# Altium PCB PlacaE3.PcbDoc
Units mm, origin at the board's own origin, x right, y up, seen from the top; angles counter-clockwise.
Board outline 100 x 100 mm, 2 copper layers (Top Layer, Bottom Layer); 90 components, 100 nets, 323 pads, 46 vias.
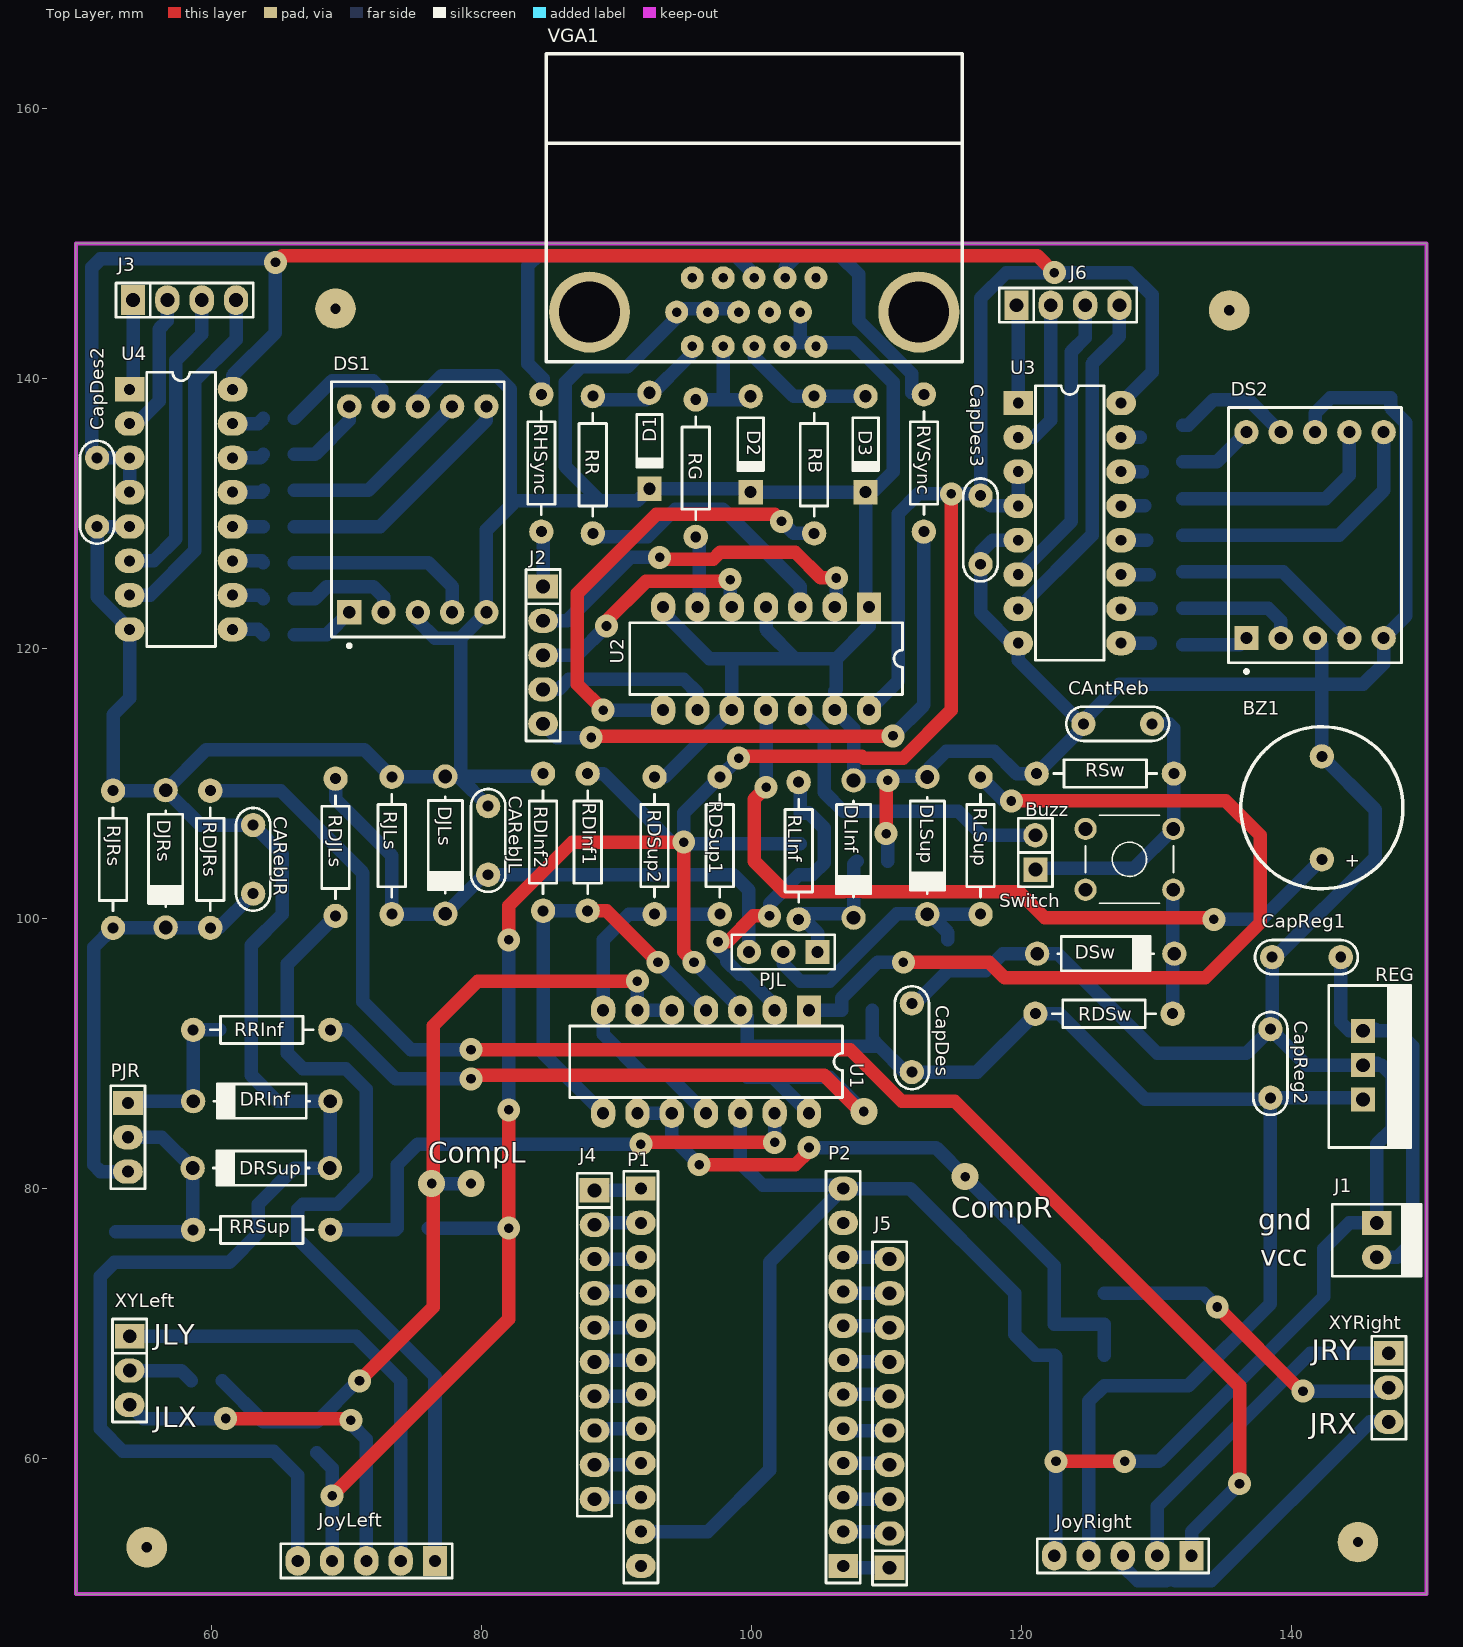
[diagram p0: Top Layer view]
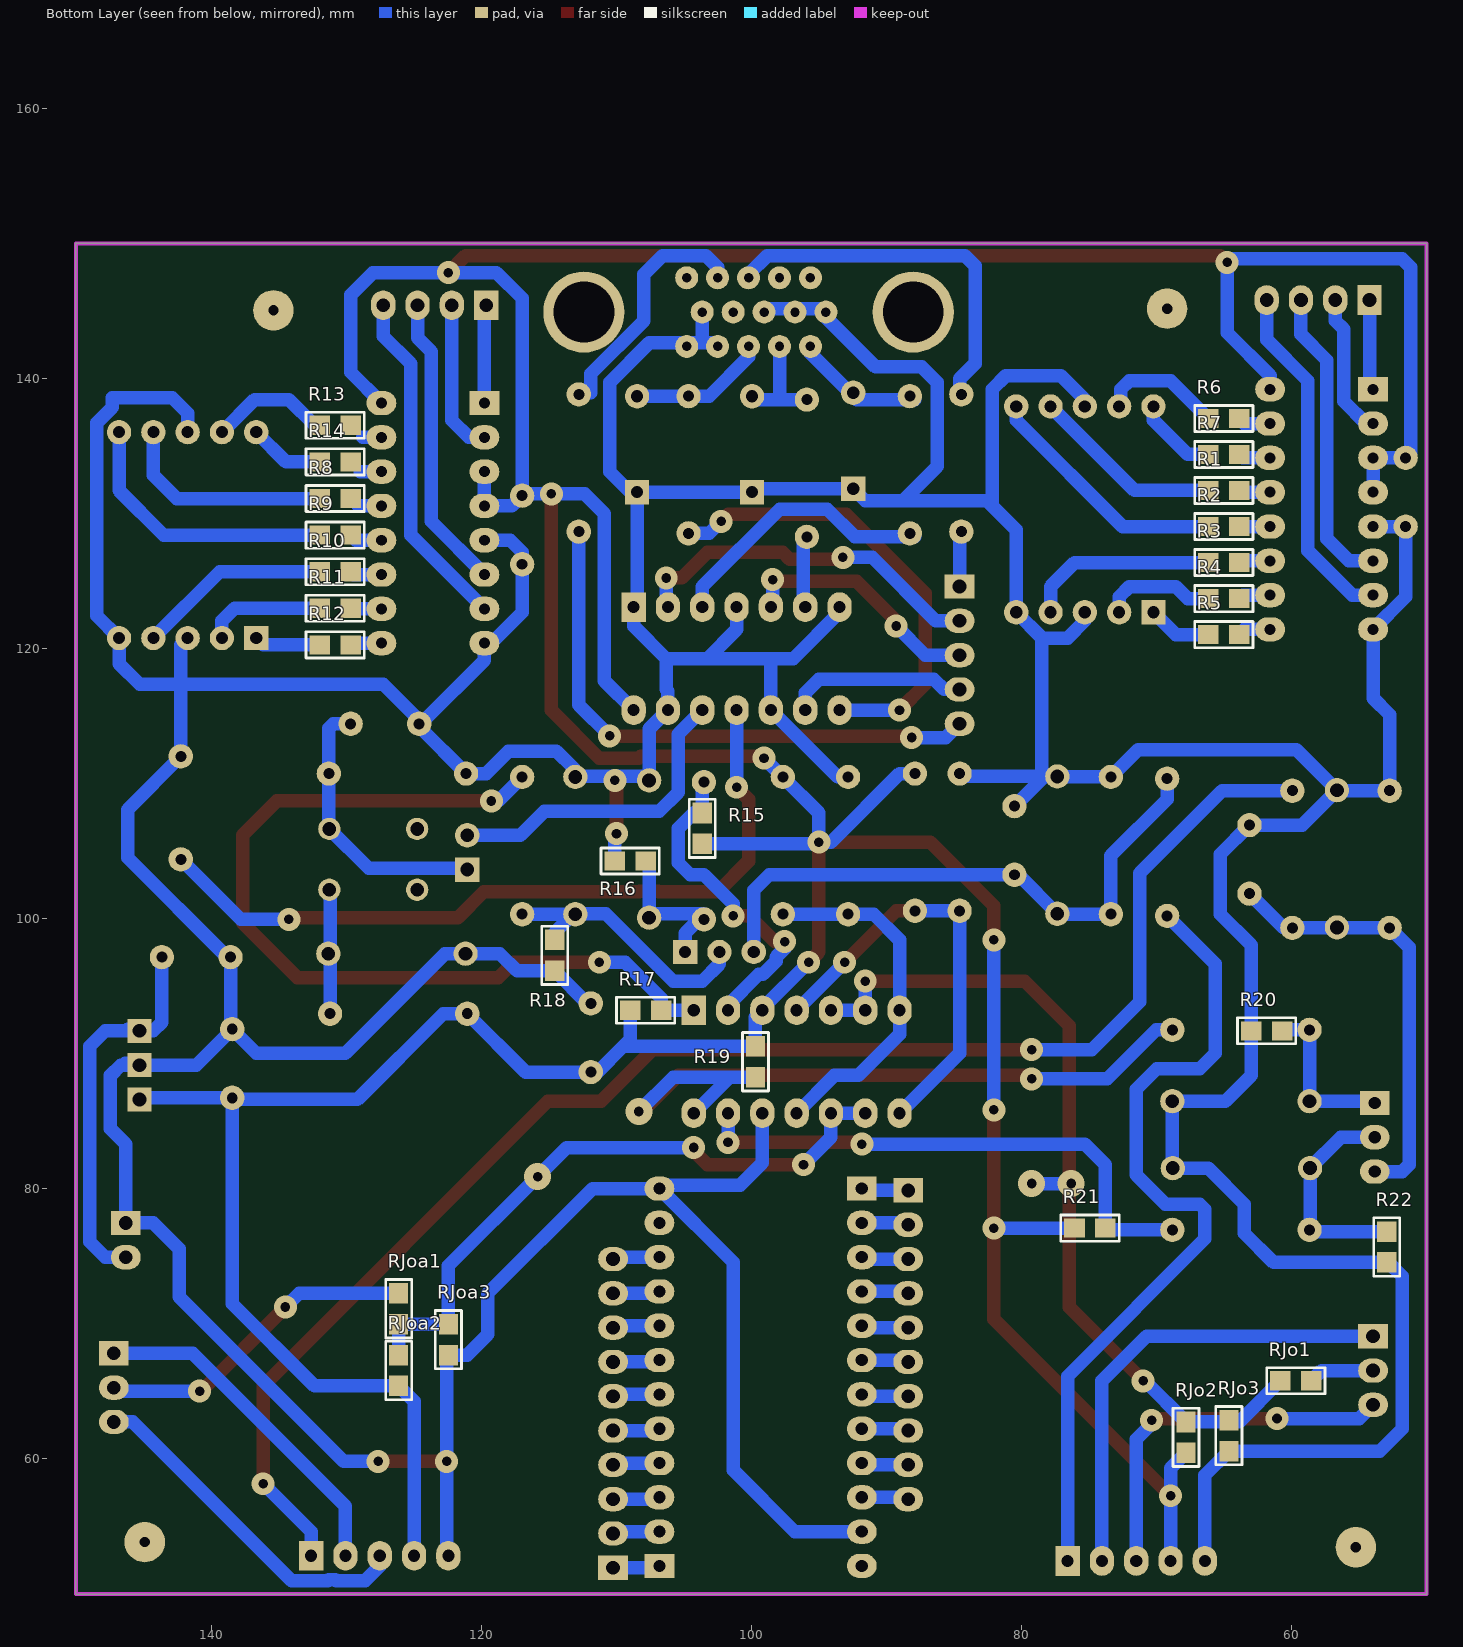
[diagram p1: Bottom Layer view, seen from below]

## Layer stack, top to bottom
Top Solder: solder mask 0.0102, Solder Resist, Dk 3.5
Top Layer: signal copper 0.0356
Dielectric1: dielectric 0.32, FR-4, Dk 4.8
Bottom Layer: signal copper 0.0356
Bottom Solder: solder mask 0.0102, Solder Resist, Dk 3.5

## Board outline
50,50 150,50 150,150 50,150

## Design rules (kind name [scope] priority, off if disabled: settings)
Clearance [All] p1: gap=0.254 ignorepadtopadclearanceinfootprint=FALSE except(0: Arc-Hole Track-Hole SMDPad-Hole THPad-Hole Via-Hole Fill-Hole Poly-Hole Region-Hole Text-Hole)
PolygonConnect [All] p1: connectstyle=Relief reliefconductorwidth=0.254 reliefentries=4 polygonreliefangle="90 Angle" airgapwidth=0.254
RoutingVias [All] p1: holewidth=0.711 width=1.27 viastyle="Through Hole" minholewidth=0.711 minwidth=1.27 maxholewidth=0.711 maxwidth=1.27
SolderMaskExpansion [All] p1: expansion=0.102
Width [All] p1: maxlimit=2 minlimit=0.5 preferedwidth=1
30 further rules are at their usual default settings.

## Components (designator, comment, footprint, x,y, rotation, side; value= is the part's Value field where it differs from the comment)
Buzz "CON2" SIP2 121.031,104.902 r90 top (schematic designator GPIO)
BZ1 "BUZZER" "BUZZER 12MM" 142.24,108.204 r90 top
CAntReb "CAP" CAP200 127.127,114.427 r180 top
CapDes "CAP" CAP200 111.887,91.186 r90 top
CapDes2 "CAP" CAP200 51.562,131.572 r270 top
CapDes3 "CAP" CAP200 116.967,128.778 r270 top
CapReg1 "CAP" CAP200 141.097,97.155 r180 top
CapReg2 "CAP" CAP200 138.43,89.281 r90 top
CARebJL "CAP" CAP200 80.518,105.791 r90 top
CARebJR "CAP" CAP200 63.119,104.394 r90 top
D1 "Diode 1N4148" DO-35 92.456,135.382 r270 top
D2 "Diode 1N4148" DO-35 99.949,135.128 r270 top
D3 "Diode 1N4148" DO-35 108.458,135.128 r270 top
DJLs "DIODO" DO41 77.343,105.447 r270 top
DJRs "DIODO" DO41 56.642,104.431 r270 top
DLInf "DIODO" DO41 107.569,105.156 r270 top
DLSup "DIODO" DO41 113.03,105.41 r270 top
DRInf "DIODO" DO41 63.754,86.487 r180 top
DRSup "DIODO" DO41 63.717,81.534 r180 top
DS1 "Dpy Blue-CC" H 75.311,130.302 r0 top
DS2 "Dpy Blue-CC" H 141.732,128.397 r0 top
DSw "DIODO" DO41 126.238,97.409 r0 top
J1 "MOLEX2" MOLEX2 146.304,77.47 r270 top
J2 "CON5" SIP5 84.582,124.587 r270 top
J3 "CON4" SIP4 58.039,145.796 r0 top
J4 "CON10" SIP10 88.392,79.883 r270 top
J5 "CON10" SIP10 110.236,51.943 r90 top
J6 "CON4" SIP4 123.444,145.415 r0 top
JoyLeft "Header 5" HDR1X5 76.581,52.451 r180 top
JoyRight "Header 5" HDR1X5 132.588,52.832 r180 top
P1 "Header 12" HDR1X12 91.821,80.02 r270 top
P2 "Header 12" HDR1X12 106.803,52.08 r90 top
PJL "Header 3" HDR1X3#1 104.902,97.536 r180 top
PJR "Header 3" HDR1X3#2 53.848,86.36 r270 top
R1 "RES" 0805 65.024,131.699 r0 bottom
R2 "RES" 0805 65.024,129.032 r0 bottom
R3 "RES" 0805 65.024,126.365 r0 bottom
R4 "RES" 0805 65.024,123.698 r0 bottom
R5 "RES" 0805 65.024,121.031 r0 bottom
R6 "RES" 0805 65.024,137.033 r0 bottom
R7 "RES" 0805 65.024,134.366 r0 bottom
R8 "RES" 0805 130.81,131.105 r0 bottom
R9 "RES" 0805 130.81,128.396 r0 bottom
R10 "RES" 0805 130.81,125.687 r0 bottom
R11 "RES" 0805 130.81,122.978 r0 bottom
R12 "RES" 0805 130.81,120.269 r0 bottom
R13 "RES" 0805 130.81,136.523 r0 bottom
R14 "RES" 0805 130.81,133.814 r0 bottom
R15 "RES" 0805 103.632,106.68 r270 bottom
R16 "RES" 0805 108.966,104.267 r180 bottom
R17 "RES" 0805 107.823,93.218 r0 bottom
R18 "RES" 0805 114.554,97.282 r90 bottom
R19 "RES" 0805 99.695,89.408 r90 bottom
R20 "RES" 0805 61.849,91.694 r180 bottom
R21 "RES" 0805 74.93,77.089 r0 bottom
R22 "RES" 0805 52.959,75.692 r90 bottom
RB "RES" RES400 104.648,128.524 r90 top
RDInf1 "RES" RES400 87.884,110.744 r270 top
RDInf2 "RES" RES400 84.582,110.744 r270 top
RDJLs "RES" RES400 69.215,100.203 r90 top
RDJRs "RES" RES400 59.944,109.474 r270 top
RDSup1 "RES" RES400 97.663,110.49 r270 top
RDSup2 "RES" RES400 92.837,110.49 r270 top
RDSw "RES" RES400 121.031,92.964 r0 top
REG "78XX" "TO-220 V" 145.288,89.154 r270 top
RG "RES" RES400 95.885,128.27 r90 top
RHSync "RES" RES400 84.455,128.651 r90 top
RJLs "RES" RES400 73.381,110.49 r270 top
RJo1 "RES" 0805 59.69,65.786 r0 bottom
RJo2 "RES" 0805 67.818,61.595 r270 bottom
RJo3 "RES" 0805 64.643,61.722 r90 bottom
RJoa1 "RES" 0805 126.111,71.12 r270 bottom
RJoa2 "RES" 0805 126.111,66.548 r270 bottom
RJoa3 "RES" 0805 122.428,68.834 r90 bottom
RJRs "RES" RES400 52.743,109.474 r270 top
RLInf "RES" RES400 103.505,110.109 r270 top
RLSup "RES" RES400 116.967,110.49 r270 top
RR "RES" RES400 88.265,128.524 r90 top
RRInf "RES" RES400 68.834,91.77 r180 top
RRSup "RES" RES400 68.834,76.962 r180 top
RSw "RES" RES400 121.121,110.744 r0 top
RVSync "RES" RES400 112.776,128.651 r90 top
Switch "TACT SWITCH" TACTSWITCH 127.992,104.394 r90 top
U1 "LM339AN" DIP14 96.647,89.408 r180 top
U2 "M74HC125B1R" DIP14 101.092,119.253 r180 top
U3 "CD4511" DIP16 119.761,138.176 r0 top
U4 "CD4511" DIP16 53.975,139.192 r0 top
VGA1 "DB15" DB15_DSUB 100.206,147.447 r180 top
XYLeft "CON3" SIP3 53.975,66.548 r270 top
XYRight "CON3" SIP3 147.193,65.278 r270 top

## Footprints (in the part's own frame and the unit in brackets; to place one, negate y for a bottom-side part, rotate by r counter-clockwise, add the part's x,y. Pads: shape width x height; smd on the part's side, far side on the other; paste and mask are expansions set on the pad)
0805 [mil] "Pasivo 0805"
  rect 60x56 smd: 1(-45,0) 2(45,0)
  silkscreen extent -85,-38 85,38, body extent -39,-25 39,25, height 15
"BUZZER 12MM" [mm]
  round 1.8 hole 0.813: 1(-3.81,0) 2(3.81,0)
  silkscreen extent -5.99,-6 6.01,6, body extent -9.36,-6 6.1,6, height 9.65
CAP200 [mm]
  round 1.8 hole 0.813: 1(-2.54,0) 2(2.54,0)
  silkscreen extent -3.81,-1.27 3.81,1.27, body extent -2.79,-1.17 2.79,1.12, height 6.24
DB15_DSUB [mm]
  round 6 hole 4.5: 0(-12.192,2.54) 16(12.192,2.54)
  round 1.7 hole 0.7: 1(4.58,5.08) 2(2.29,5.08) 3(0,5.08) 4(-2.29,5.08) 5(-4.58,5.08) 6(5.73,2.54) 7(3.44,2.54) 8(1.15,2.54) 9(-1.14,2.54) 10(-3.43,2.54) 11(4.58,0) 12(2.29,0) 13(0,0) 14(-2.29,0) 15(-4.58,0)
  silkscreen extent -15.39,-16.57 15.39,6.23
DIP14 [mm] "DIP; 14 Leads; Row Spacing 7.62 mm; Pitch 2.54 mm"
  rect 1.8x2.2 hole 0.9: 1(-7.62,-3.81)
  oval 1.8x2.2 hole 0.9: 2(-5.08,-3.81) 3(-2.54,-3.81) 4(0,-3.81) 5(2.54,-3.81) 6(5.08,-3.81) 7(7.62,-3.81) 8(7.62,3.81) 9(5.08,3.81) 10(2.54,3.81) 11(0,3.81) 12(-2.54,3.81) 13(-5.08,3.81) 14(-7.62,3.81)
  silkscreen extent -10.1,-2.65 10.1,2.65
DIP16 [mm]
  rect 2.2x1.8 hole 0.813: 1(0,0)
  oval 2.2x1.8 hole 0.813: 2(0,-2.54) 3(0,-5.08) 4(0,-7.62) 5(0,-10.16) 6(0,-12.7) 7(0,-15.24) 8(0,-17.78) 9(7.62,-17.78) 10(7.62,-15.24) 11(7.62,-12.7) 12(7.62,-10.16) 13(7.62,-7.62) 14(7.62,-5.08) 15(7.62,-2.54) 16(7.62,0)
  silkscreen extent 1.27,-19.05 6.35,1.27, body extent -0.08,-18.89 7.79,1.11, height 1.98
DO41 [mm]
  round 1.8 hole 1.016: 1(-5.08,0) 2(5.08,0)
  silkscreen extent -3.56,-1.27 3.56,1.27, body extent -5.46,-1.19 5.46,1.37, height 2.03
DO-35 [mm] "Diode, Axial; Body 3.8 x 1.9 mm (LxDia. max), Lead Dia. 0.53 mm (max)"
  round 1.8 hole 0.9: 1(-3.55,0)
  rect 1.8x1.8 hole 0.9: 2(3.55,0)
  silkscreen extent -1.95,-0.95 2.05,0.95
H [mm] "LED, 7-Segment Display, 14.2 mm, RHD; 10 Leads; Row Space 15.24 mm; Pitch 2.54 mm"
  rect 1.8x1.8 hole 0.9: 1(-5.08,-7.62)
  round 1.8 hole 0.9: 2(-2.54,-7.62) 3(0,-7.62) 4(2.54,-7.62) 5(5.08,-7.62) 6(5.08,7.62) 7(2.54,7.62) 8(0,7.62) 9(-2.54,7.62) 10(-5.08,7.62)
  silkscreen extent -6.4,-10.22 6.4,9.45, body extent -6.4,-9.45 6.4,9.45, height 8.25
HDR1X3#1 [mm] "Connector; Header; 3 Position"
  rect 1.8x1.8 hole 0.9: 1(0,0)
  round 1.8 hole 0.9: 2(2.54,0) 3(5.08,0)
  silkscreen extent -1.27,-1.27 6.35,1.27
HDR1X3#2 [mm] "Connector; Header; 3 Position"
  rect 1.8x2.2 hole 0.9: 1(0,0)
  oval 1.8x2.2 hole 0.9: 2(2.54,0) 3(5.08,0)
  silkscreen extent -1.27,-1.27 6.35,1.27
HDR1X5 [mm] "Connector; Header; 5 Position"
  rect 1.8x2.2 hole 0.9: 1(0,0)
  oval 1.8x2.2 hole 0.9: 2(2.54,0) 3(5.08,0) 4(7.62,0) 5(10.16,0)
  silkscreen extent -1.27,-1.27 11.43,1.27
HDR1X12 [mm] "Connector; Header; 12 Position"
  rect 1.8x2.2 hole 0.9: 1(0,0)
  oval 1.8x2.2 hole 0.9: 2(2.54,0) 3(5.08,0) 4(7.62,0) 5(10.16,0) 6(12.7,0) 7(15.24,0) 8(17.78,0) 9(20.32,0) 10(22.86,0) 11(25.4,0) 12(27.94,0)
  silkscreen extent -1.27,-1.27 29.21,1.27
MOLEX2 [mm]
  rect 1.8x2.2 hole 1.016: 1(0,0)
  oval 1.8x2.2 hole 1.016: 2(2.54,0)
  silkscreen extent -1.4,-3.3 3.94,3.3, body extent -1.27,-3.18 3.81,3.18, height 10.74
RES400 [mm]
  round 1.8 hole 0.813: 1(0,0) 2(10.16,0)
  silkscreen extent 1.27,-1.02 8.89,1.02, body extent -0.3,-1.14 10.46,1.17, height 2.43
SIP2 [mm]
  rect 1.8x1.8 hole 1.016: 1(-1.27,0)
  round 1.8 hole 1.016: 2(1.27,0)
  silkscreen extent -2.54,-1.27 2.54,1.27
SIP3 [mm]
  rect 1.8x2.2 hole 1.016: 1(-2.54,0)
  oval 1.8x2.2 hole 1.016: 2(0,0) 3(2.54,0)
  silkscreen extent -3.81,-1.27 3.81,1.27, body extent -3.81,-1.3 3.81,1.24, height 8.38
SIP4 [mm]
  rect 1.8x2.2 hole 1.016: 1(-3.81,0)
  oval 1.8x2.2 hole 1.016: 2(-1.27,0) 3(1.27,0) 4(3.81,0)
  silkscreen extent -5.08,-1.27 5.08,1.27, body extent -5.08,-1.27 5.08,1.27, height 8.38
SIP5 [mm]
  rect 1.8x2.2 hole 1.016: 1(0,0)
  oval 1.8x2.2 hole 1.016: 2(2.54,0) 3(5.08,0) 4(7.62,0) 5(10.16,0)
  silkscreen extent -1.27,-1.27 11.43,1.27, body extent -1.27,-1.27 11.43,1.27, height 8.38
SIP10 [mm]
  rect 1.8x2.2 hole 1.016: 1(0,0)
  oval 1.8x2.2 hole 1.016: 2(2.54,0) 3(5.08,0) 4(7.62,0) 5(10.16,0) 6(12.7,0) 7(15.24,0) 8(17.78,0) 9(20.32,0) 10(22.86,0)
  silkscreen extent -1.27,-1.27 24.13,1.27, body extent -1.27,-1.3 24.13,1.27, height 8.38
TACTSWITCH [mil]
  round 65 hole 40: 1(-88.58,-127.95) 2(-88.58,127.95) 3(88.58,-127.95) 4(88.58,127.95)
  silkscreen extent -128,-128 128,128, body extent -120,-156 124,156, height 276
"TO-220 V" [mil]
  rect 70x70 hole 40: 1(-100,0) 2(0,0) 3(100,0)
  silkscreen extent -232,-100 240,139, body extent -197,-79 197,118, height 709

## Part data
D1 D2 D3: "High Conductance Fast Diode", Code_JEDEC=DO-204-AH, ComponentLink1Description="Manufacturer Link", ComponentLink1URL=http://www.fairchildsemi.com/, ComponentLink2Description=Datasheet, ComponentLink2URL=http://www.fairchildsemi.com/ds/1N%2F1N4148.pdf, DatasheetVersion=1997, LatestRevisionDate=17-Jul-2002, LatestRevisionNote="Re-released for DXP Platform.", PackageDescription="Diode, Axial; Body 3.8 x 1.9 mm (LxDia. max), Lead Dia. 0.53 mm (max)", PackageReference=DO-35, Published=8-Jun-2000, Publisher="Altium Limited"
DS1 DS2: "14.2 mm General Purpose Blue 7-Segment Display: CC, RH DP, Gray Surface", Colour=Blue, ComponentLink1Description="Manufacturer Link", ComponentLink1URL=http://www.agilent.com/, DatasheetVersion=24-Sep-2002, LatestRevisionDate=17-Dec-2003, LatestRevisionNote="Schematic revised, PCB Footprint replaced.", MinimumIntensity="2020 ucd", Note="IF = 10 mA", PackageDescription="LED, 7-Segment Display, 14.2 mm, RHD; 10 Leads; Row Space 15.24 mm; Pitch 2.54 mm", PackageReference=H, PackageVersion=24-Sep-2002, Published=8-Jun-2000, Publisher="Altium Limited"
JoyLeft JoyRight: "Header, 5-Pin", LatestRevisionDate=17-Jul-2002, LatestRevisionNote="Re-released for DXP Platform.", Publisher="Altium Limited"
P1 P2: "Header, 12-Pin", LatestRevisionDate=17-Jul-2002, LatestRevisionNote="Re-released for DXP Platform.", Publisher="Altium Limited"
PJL PJR: "Header, 3-Pin", LatestRevisionDate=17-Jul-2002, LatestRevisionNote="Re-released for DXP Platform.", Publisher="Altium Limited"
REG: "REGULDOR POSITIVO"
U1: "Low-Power Quad Voltage Comparator", ComponentLink1Description="Manufacturer Link", ComponentLink1URL=http://www.st.com/, ComponentLink2Description=Datasheet, ComponentLink2URL=http://www.st.com/stonline/products/literature/ds/2159/lm239.pdf, DatasheetVersion=Jun-1998, LatestRevisionDate=06-Jun-2005, LatestRevisionNote="Stylized 3D Model Added.", PackageDescription="DIP; 14 Leads; Row Spacing 7.62 mm; Pitch 2.54 mm", PackageReference=DIP14, PackageVersion=Jan-1997, Published=24-Aug-2001, Publisher="Altium Limited"
U2: "Quad Bus Buffer (3-State)", ComponentLink1Description="Manufacturer Link", ComponentLink1URL=http://www.st.com/, ComponentLink2Description=Datasheet, ComponentLink2URL=http://www.st.com/stonline/products/literature/ds/1894/m74hc125.pdf, DatasheetVersion=Sep-1993, LatestRevisionDate=06-Jun-2005, LatestRevisionNote="Stylized 3D Model Added.", PackageDescription="DIP; 14 Leads; Row Spacing 7.62 mm; Pitch 2.54 mm", PackageReference=DIP14, PackageVersion=Jan-1997, Published=8-Jun-2000, Publisher="Altium Limited"
U3 U4: "BCD to 7 SEGMENTOS"
VGA1: "DB15 VGA Male Connector"

## Free pads (board coordinates)
  round 3 hole 0.762: 0(144.907,53.848) 1(55.245,53.467) 2(69.215,145.161) 3(135.382,145.034)

## Via types
v1: diameter 1.7, hole 0.711, Top Layer to Bottom Layer, 42 vias
v2: diameter 2, hole 0.711, Top Layer to Bottom Layer, 4 vias

## Nets (pads, with @x,y where several pads share a name; then routed paths per layer and width w, separated by ;. In a path a pad name is that pad's centre, name@x,y a point inside that pad or via, vN(x,y) a via of type N, cw(c..) or ccw(c..) an arc to the next point about the centre after c; other vN are vias at no path point)
3.3V: J4.10 P1.10 | length 3.3
  Bottom Layer w1: J4.10@88.529,57.16 P1.10
5V: CapDes2.1 CapDes3.1 CapDes.1 CapReg2.1 JoyLeft.4 JoyRight.4 R15.2 R17.2 R19.2 R21.2 RDInf1.1 RDSup1.1 RDSw.1 REG.3 RJo2.2 RJoa2.2 U1.3 U2.14 U3.3 U3.4 U3.16 U4.3 U4.4 U4.16 | length 419.5
  Top Layer w1: v1(64.77,148.59) 65.276,149.096 121.16,149.096 v1(122.428,147.828) ; v1(68.961,57.277) 82.042,70.358 v1(82.042,77.089) v1(82.042,85.852) ; v1(82.042,98.425) 82.042,100.965 86.741,105.664 v1(94.996,105.664) 94.996,97.536 v1(95.758,96.774) ; v1(99.06,111.887) 99.204,112.031 108.192,112.031 108.336,111.887 111.252,111.887 114.808,115.443 v1(114.808,131.445)
  Bottom Layer w1: U4.4 U4.3 CapDes2.1 51.181,134.493 51.181,148.209 51.816,148.844 64.77,148.844 v1(64.77,148.59) 64.77,143.383 61.595,140.208 U4.16 ; RJo2.2 68.961,59.309 v1(68.961,57.277) JoyLeft.4 ; R21.2 v1(82.042,77.089) ; v1(82.042,85.852) v1(82.042,98.425) ; RDInf1.1 89.027,110.744 94.107,105.664 v1(94.996,105.664) ; v1(95.758,96.774) 99.187,93.345 U1.3 99.695,92.71 R19.2 109.474,90.551 ; v1(99.06,111.887) RDSup1.1 94.996,107.823 v1(94.996,105.664) ; R15.2 95.123,105.537 v1(94.996,105.664) ; U2.14 110.871,117.602 110.871,129.974 112.342,131.445 v1(114.808,131.445) 116.84,131.445 CapDes3.1 ; R17.2 108.966,91.059 109.474,90.551 ; U3.3 U3.4 117.729,130.556 CapDes3.1 ; JoyRight.4 124.968,64.262 RJoa2.2 132.334,65.405 138.43,71.501 CapReg2.1@138.43,86.614 ; U3.16 129.667,140.462 129.667,146.177 128.016,147.828 v1(122.428,147.828) 118.872,147.828 116.967,145.923 CapDes3.1 ; REG.3 145.161,86.741 CapReg2.1 CapReg2.1@138.43,86.614 ; 109.474,90.551 111.379,88.646 CapDes.1 116.713,88.646 RDSw.1 122.809,92.964 129.159,86.614 CapReg2.1@138.43,86.614
A1: J3.4 U4.7 | length 26
  Bottom Layer w1: U4.7 55.499,123.952 58.801,127.254 58.801,139.827 61.849,142.875 J3.4
A2: J6.4 U3.7 | length 25.6
  Bottom Layer w1: U3.7 125.222,128.397 125.222,141.097 127.254,143.129 J6.4
B: J2.4 U2.9 | length 13.4
  Bottom Layer w1: J2.4 85.725,116.967 86.487,117.729 94.996,117.729 96.012,116.713 U2.9
B1: J3.1 U4.1 | length 6.7
  Bottom Layer w1: U4.1 54.229,139.446 J3.1
B2: J6.1 U3.1 | length 7.3
  Bottom Layer w1: J6.1 119.761,145.288 U3.1
BBUF: RB.1 U2.8 | length 34.4
  Top Layer w1: v1(89.027,115.443) 87.122,117.348 87.122,124.079 92.967,129.924 101.724,129.924 v1(102.235,129.413)
  Bottom Layer w1: v1(89.027,115.443) U2.8 ; v1(102.235,129.413) 103.124,128.524 RB.1
BUZZER: Buzz.2 U2.12 | length 23.8
  Bottom Layer w1: U2.12 105.41,113.665 105.41,109.347 106.807,107.95 115.316,107.95 117.094,106.172 Buzz.2
BUZZERBUF: BZ1.1 U2.11 | length 57.2
  Top Layer w1: v1(101.092,109.728) 100.203,108.839 100.203,104.267 102.489,101.981 106.843,101.981 106.884,102.021 108.254,102.021 108.295,101.981 112.342,101.981 112.345,101.984 113.715,101.984 113.718,101.981 116.279,101.981 116.282,101.984 119.813,101.984 121.721,100.076 134.112,100.076 v1(134.239,99.949)
  Bottom Layer w1: v1(101.092,109.728) U2.11 ; v1(134.239,99.949) 137.795,99.949 BZ1.1
C1: J3.2 U4.2 | length 10.6
  Bottom Layer w1: U4.2 54.501,136.652 56.15,138.301 56.15,143.653 56.769,144.272 J3.2
C2: J6.2 U3.2 | length 11.4
  Bottom Layer w1: U3.2 120.904,135.636 122.174,136.906 J6.2
D1: J3.3 U4.6 | length 22.6
  Bottom Layer w1: U4.6 55.753,126.492 57.404,128.143 57.404,141.351 59.309,143.256 J3.3
D2: J6.3 U3.6 | length 22
  Bottom Layer w1: U3.6 123.698,129.413 123.698,141.986 124.714,143.002 J6.3
G: J2.3 U2.5 | length 18.6
  Top Layer w1: v1(89.281,121.666) 89.281,121.793 89.154,121.92 92.202,124.968 94.98,124.968 94.981,124.967 97.297,124.967 97.298,124.968 98.298,124.968 v1(98.425,125.095)
  Bottom Layer w1: J2.3 87.122,119.507 v1(89.281,121.666) ; v1(98.425,125.095) 98.425,123.19 U2.5
GBUF: RG.1 U2.6 | length 4.8
  Bottom Layer w1: U2.6 96.139,123.19 RG.1@96.139,127.762
GND: BZ1.2 CAntReb.2 CapDes2.2 CapDes3.2 CapDes.2 CapReg1.2 CapReg2.2 CARebJL.2 CARebJR.2 D1.2 D2.2 D3.2 DJLs.1 DJRs.1 DLInf.1 DLSup.1 DRInf.1 DRSup.1 DS1.3 DS1.5 DS1.8 DS2.3 DS2.5 DS2.8 DSw.1 J1.1 JoyLeft.5 JoyRight.5 P1.11 P2.12 R16.1 R18.1 R20.1 R22.1 RDInf2.1 RDSup2.1 REG.2 RJLs.1 RJo3.1 RJoa3.1 RJRs.1 RSw.1 U1.12 U2.1 U2.4 U2.7 U2.10 U2.13 U3.5 U3.8 U4.5 U4.8 VGA1.4 VGA1.5 VGA1.6 VGA1.7 VGA1.8 VGA1.10 | length 630.5
  Top Layer w1: v1(109.982,106.299) 109.982,110.236 v1(110.109,110.236) ; v1(122.555,59.817) v1(127.635,59.817)
  Bottom Layer w1: U4.5 CapDes2.2 51.562,123.825 U4.8 53.975,116.332 52.743,115.1 RJRs.1 56.605,109.474 DJRs.1@56.896,109.183 ; JoyLeft.5 66.421,58.801 RJo3.1 53.467,60.579 51.816,62.23 51.816,73.533 52.832,74.549 R22.1 61.341,74.549 63.5,76.708 63.5,78.867 66.167,81.534 DRSup.1 68.834,81.571 DRInf.1 64.897,86.487 62.992,88.392 R20.1 62.992,98.044 65.278,100.33 65.278,104.775 CARebJR.2 59.219,106.934 DJRs.1 59.653,112.522 71.349,112.522 RJLs.1 77.306,110.49 DJLs.1 78.322,110.527 ; DS1.3 75.311,122.047 76.581,120.777 78.486,120.777 ; DS1.8 75.311,138.43 77.089,140.208 81.153,140.208 82.169,139.192 82.169,130.556 ; CARebJL.2 78.322,110.527 ; RDInf2.1 84.365,110.527 78.322,110.527 ; P1.11 96.784,54.62 101.346,59.182 101.346,74.563 P2.12 ; RDSup2.1 93.599,110.49 U2.10 98.552,118.999 98.806,119.253 ; U2.7 93.472,122.682 96.901,119.253 98.806,119.253 ; VGA1.8@99.053,145.161 94.473,145.161 94.473,144.511 90.805,140.843 87.376,140.843 86.233,139.7 86.233,133.477 88.767,130.943 ; U1.12 99.187,81.915 100.838,80.264 106.803,80.264 P2.12 ; U2.4 101.092,121.412 103.251,119.253 ; VGA1.4@102.493,142.621 107.569,142.621 110.49,139.7 110.49,133.096 108.972,131.578 D3.2 ; 103.633,142.747 VGA1.10@103.633,145.161 ; v1(109.982,106.299) 110.109,106.172 R16.1 ; v1(110.109,110.236) v1@110.109,110.527 ; CapDes.2 112.141,93.726 R18.1 117.348,96.139 118.618,97.409 DSw.1 122.682,97.409 130.048,90.043 136.652,90.043 CapReg2.2 ; U3.5 117.856,128.016 116.967,127.127 CapDes3.2 116.967,122.682 119.507,120.142 U3.8 119.761,119.126 124.206,114.681 CAntReb.2@124.587,114.681 ; JoyRight.5 122.555,52.959 v1(122.555,59.817) 122.555,67.564 RJoa3.1 121.031,67.691 119.507,69.215 119.507,72.263 111.75,80.02 P2.12 ; v1(127.635,59.817) 130.175,59.817 142.367,72.009 142.367,75.565 144.272,77.47 J1.1 146.304,83.312 147.447,84.455 147.447,88.392 146.685,89.154 146.481,89.154 ; DS2.3 142.24,120.269 142.24,117.348 ; DS2.8 141.732,137.414 142.875,138.557 147.32,138.557 147.32,137.848 148.466,136.702 148.466,122.431 DS2.5 146.812,118.872 145.288,117.348 142.24,117.348 ; REG.2@145.923,89.281 146.354,89.281 146.481,89.154 ; 78.322,110.527 78.486,110.692 78.486,120.777 ; 78.486,120.777 DS1.5 80.391,128.778 82.169,130.556 ; 82.169,130.556 82.556,130.943 88.767,130.943 ; 88.767,130.943 91.567,130.943 D1.2 99.695,131.832 D2.2 D3.2 ; 98.806,119.253 103.251,119.253 ; 103.251,119.253 106.299,119.253 ; 106.299,119.253 106.299,116.967 106.172,116.84 U2.13 107.569,114.046 107.569,110.527 v1@110.109,110.527 ; 106.299,119.253 108.712,121.666 U2.1 108.458,123.317 D3.2 ; v1@110.109,110.527 113.157,110.527 113.157,111.125 114.427,112.395 117.983,112.395 119.634,110.744 RSw.1 124.587,114.21 CAntReb.2 CAntReb.2@124.587,114.681 ; CAntReb.2@124.587,114.681 127.254,117.348 142.24,117.348 ; CapReg2.2 138.557,91.948 CapReg1.2 138.811,97.155 146.177,104.521 146.177,108.077 BZ1.2 142.24,117.348 ; CapReg2.2 141.097,89.154 REG.2 146.481,89.154
GPSWITCH: Buzz.1 CAntReb.1 RSw.2 Switch.3 | length 20.7
  Bottom Layer w1: Buzz.1 121.123,103.724 128.322,103.724 Switch.3 131.281,106.682 RSw.2 131.281,114.083 130.937,114.427 CAntReb.1
H_SYNC: J2.1 RHSync.1 | length 3.9
  Bottom Layer w1: J2.1 RHSync.1@84.582,128.524
JL: RJo1.1 XYLeft.2 | length 4.9
  Bottom Layer w1: XYLeft.2 57.785,66.548 RJo1.1
JLINF: DLInf.2 PJL.1 R16.2 RLInf.2 | length 11.5
  Bottom Layer w1: PJL.1 104.902,98.933 103.505,100.33 103.542,100.367 107.569,100.367 107.569,104.013 R16.2
JLS: JoyLeft.1 RDJLs.1 | length 61.3
  Bottom Layer w1: RDJLs.1 65.659,96.647 65.659,90.043 66.802,88.9 69.977,88.9 71.501,87.376 71.501,81.026 69.342,78.867 66.802,78.867 66.421,78.486 66.421,76.292 76.581,66.132 JoyLeft.1
JLSUP: DLSup.2 PJL.2 R18.2 RLSup.2 | length 20.6
  Bottom Layer w1: PJL.2 102.362,96.647 103.632,95.377 105.791,95.377 110.781,100.367 113.157,100.367 DLSup.2@113.194,100.33 ; R18.2 114.554,98.97 DLSup.2@113.194,100.33 ; RLSup.2 DLSup.2@113.194,100.33
JLSWITCH: CARebJL.1 DJLs.2 PJL.3 RDJLs.2 RJLs.2 | length 44.4
  Bottom Layer w1: RDJLs.2 69.215,108.839 73.381,104.673 RJLs.2 DJLs.2@77.343,100.33 ; DJLs.2 80.227,103.251 CARebJL.1 98.679,103.251 99.822,102.108 PJL.3
JLX: JoyLeft.3 XYLeft.3 | length 28.1
  Top Layer w1: v1(61.087,62.992) 70.231,62.992 v1(70.358,62.865)
  Bottom Layer w1: XYLeft.3@54.356,64.008 XYLeft.3 54.991,62.992 v1(61.087,62.992) ; v1(70.358,62.865) 70.358,62.611 71.501,61.468 JoyLeft.3
JLY: JoyLeft.2 XYLeft.1 | length 34.8
  Bottom Layer w1: XYLeft.1 70.739,69.088 74.041,65.786 JoyLeft.2
JR: RJoa1.1 XYRight.2 | length 24.2
  Top Layer w1: v1(134.493,71.247) 140.716,65.024 v1(140.843,65.024)
  Bottom Layer w1: RJoa1.1 133.477,72.263 v1(134.493,71.247) ; v1(140.843,65.024) 146.939,65.024 XYRight.2
JRINF: DRInf.2 PJR.1 R20.2 RRInf.2 | length 12.1
  Bottom Layer w1: PJR.1 53.975,86.487 DRInf.2 RRInf.2 R20.2@60.63,91.77
JRS: JoyRight.1 RDJRs.1 | length 114.1
  Top Layer w1: v1(79.248,90.297) 107.315,90.297 111.125,86.487 115.062,86.487 136.144,65.405 v1(136.144,58.166)
  Bottom Layer w1: RDJRs.1 65.151,109.474 71.247,103.378 71.247,93.853 74.803,90.297 v1(79.248,90.297) ; JoyRight.1 132.588,54.61 v1(136.144,58.166)
JRSUP: DRSup.2 PJR.2 R22.2 RRSup.2 | length 16.1
  Bottom Layer w1: R22.2 58.547,76.835 RRSup.2 58.637,76.999 DRSup.2 56.351,83.82 PJR.2
JRSWITCH: CARebJR.1 DJRs.2 PJR.3 RDJRs.2 RJRs.2 | length 32.3
  Bottom Layer w1: PJR.3 51.816,81.28 51.308,81.788 51.308,97.879 RJRs.2 RDJRs.2 60.579,99.314 CARebJR.1
JRX: JoyRight.3 XYRight.3 | length 25.8
  Bottom Layer w1: JoyRight.3 127.508,52.07 128.6,50.978 130.733,50.978 130.809,51.054 131.3,51.054 131.376,50.978 134.036,50.978 145.796,62.738 XYRight.3
JRY: JoyRight.2 XYRight.1 | length 25.5
  Bottom Layer w1: JoyRight.2 130.048,56.497 141.369,67.818 XYRight.1
NetCapReg1_1: CapReg1.1 J1.2 REG.1 | length 28.1
  Bottom Layer w1: CapReg1.1 143.637,92.329 144.272,91.694 REG.1 ; REG.1@145.669,92.075 REG.1@145.923,91.821 ; 146.177,91.821 146.177,91.694 147.828,91.694 148.971,90.551 148.971,76.073 147.828,74.93 J1.2
NetDS1_1: DS1.1 R5.2 | length 4.7
  Bottom Layer w1: R5.2 68.58,121.031 DS1.1
NetDS1_2: DS1.2 R4.2 | length 8.4
  Bottom Layer w1: R4.2 67.691,123.698 68.58,124.587 72.009,124.587 72.771,123.825 DS1.2
NetDS1_4: DS1.4 R3.2 | length 14.3
  Bottom Layer w1: R3.2 76.073,126.365 77.851,124.587 DS1.4
NetDS1_6: DS1.6 R2.2 | length 18.5
  Bottom Layer w1: R2.2 72.517,129.032 80.391,136.906 DS1.6
NetDS1_7: DS1.7 R1.2 | length 14.3
  Bottom Layer w1: R1.2 71.628,131.699 DS1.7
NetDS1_9: DS1.9 R6.2 | length 9.2
  Bottom Layer w1: R6.2 68.961,139.827 72.009,139.827 72.644,139.192 72.644,138.049 DS1.9
NetDS1_10: DS1.10 R7.2 | length 6.1
  Bottom Layer w1: R7.2 67.691,134.366 70.231,136.906 DS1.10
NetDS2_1: DS2.1 R12.2 | length 4.2
  Bottom Layer w1: R12.2 DS2.1@136.144,120.269
NetDS2_2: DS2.2 R11.2 | length 8.9
  Bottom Layer w1: R11.2 138.261,122.978 139.192,122.047 DS2.2
NetDS2_4: DS2.4 R10.2 | length 14.4
  Bottom Layer w1: R10.2 139.362,125.687 DS2.4
NetDS2_6: DS2.6 R9.2 | length 20.5
  Bottom Layer w1: R9.2 143.509,128.396 146.812,131.699 DS2.6
NetDS2_7: DS2.7 R8.2 | length 16.2
  Bottom Layer w1: R8.2 142.535,131.105 144.272,132.842 DS2.7
NetDS2_9: DS2.9 R13.2 | length 9
  Bottom Layer w1: R13.2 132.332,136.523 134.239,138.43 136.779,138.43 DS2.9
NetDS2_10: DS2.10 R14.2 | length 5.6
  Bottom Layer w1: R14.2 134.449,133.814 DS2.10
NetDSw_2: DSw.2 RDSw.2 Switch.1 | length 9.2
  Bottom Layer w1: RDSw.2 131.191,102.093 Switch.1
NetR1_1: R1.1 U4.13 | length 2.3
  Bottom Layer w1: U4.13 63.754,131.572 R1.1
NetR2_1: R2.1 U4.12 | length 2.3
  Bottom Layer w1: U4.12 R2.1
NetR3_1: R3.1 U4.11 | length 2.3
  Bottom Layer w1: U4.11 63.754,126.492 R3.1
NetR4_1: R4.1 U4.10 | length 2.4
  Bottom Layer w1: U4.10 63.627,123.952 R4.1
NetR5_1: R5.1 U4.9 | length 2.4
  Bottom Layer w1: U4.9 63.5,121.412 R5.1
NetR6_1: R6.1 U4.15 | length 2.4
  Bottom Layer w1: U4.15 63.5,136.652 R6.1
NetR7_1: R7.1 U4.14 | length 2.4
  Bottom Layer w1: U4.14 63.627,134.112 R7.1
NetR8_1: R8.1 U3.13 | length 1.7
  Bottom Layer w1: U3.13 R8.1@129.118,130.556
NetR9_1: R9.1 U3.12 | length 1.9
  Bottom Layer w1: U3.12 R9.1@129.287,128.016
NetR10_1: R10.1 U3.11 | length 2.1
  Bottom Layer w1: U3.11 R10.1@129.456,125.476
NetR11_1: R11.1 U3.10 | length 2.2
  Bottom Layer w1: U3.10 R11.1@129.625,122.936
NetR12_1: R12.1 U3.9 | length 2.2
  Bottom Layer w1: U3.9 R12.1@129.54,120.396
NetR13_1: R13.1 U3.15 | length 1.4
  Bottom Layer w1: U3.15 128.78,135.636
NetR14_1: R14.1 U3.14 | length 1.6
  Bottom Layer w1: U3.14 128.949,133.096
NetR15_1: R15.1 RLInf.1 U1.2 | length 25.3
  Top Layer w1: v1(97.536,98.298) 98.245,98.298 100.15,100.203 v1(101.346,100.203)
  Bottom Layer w1: v1(97.536,98.298) 97.536,97.79 98.168,97.158 98.168,96.851 99.137,95.882 99.444,95.882 101.727,93.599 U1.2 ; v1(101.346,100.203) 101.346,101.092 103.505,103.251 104.521,103.251 105.41,104.14 105.41,106.68 104.267,107.823 R15.1 103.632,110.363 RLInf.1@103.505,110.49
NetR17_1: R17.1 RLSup.1 U1.1 | length 66.5
  Top Layer w1: v1(111.252,96.774) 117.602,96.774 118.745,95.631 133.604,95.631 137.668,99.695 137.668,106.172 135.128,108.712 v1(119.253,108.712)
  Bottom Layer w1: U1.1 R17.1 106.68,94.107 109.347,96.774 v1(111.252,96.774) ; RLSup.1 118.745,108.712 v1(119.253,108.712)
NetR19_1: R19.1 RRInf.1 U1.14 | length 56
  Top Layer w1: v1(79.248,88.138) 79.502,88.392 105.41,88.392 v2@108.331,85.471
  Bottom Layer w1: RRInf.1 70.028,91.77 73.66,88.138 v1(79.248,88.138) ; R19.1 101.6,88.265 ; U1.14 101.6,88.265 ; v2@108.331,85.471 v2(108.331,85.725) 105.791,88.265 101.6,88.265
NetR21_1: R21.1 RRSup.1 U1.13 | length 40.7
  Top Layer w1: v1(91.821,83.312) 92.075,83.566 92.202,83.439 v1(101.727,83.439)
  Bottom Layer w1: RRSup.1 73.66,76.962 R21.1 73.787,81.788 75.311,83.312 v1(91.821,83.312) ; v1(101.727,83.439) 101.727,85.344 101.6,85.471 U1.13
NetRJo1_2: RJo1.2 RJo2.1 RJo3.2 U1.5 U1.6 | length 65.3
  Top Layer w1: v1(70.993,65.786) 76.454,71.247 76.454,92.075 79.756,95.377 v1(91.567,95.377)
  Bottom Layer w1: RJo1.2 63.881,62.738 RJo2.1 70.866,65.786 v1(70.993,65.786) ; v2(76.327,80.391) v2(79.248,80.391) ; v1(91.567,95.377) U1.6 U1.5
NetRJoa1_2: RJoa1.2 RJoa2.1 RJoa3.2 U1.9 U1.10 | length 48.1
  Top Layer w1: v1(96.139,81.788) 103.251,81.788 104.267,82.804 v1(104.267,83.058)
  Bottom Layer w1: U1.9 U1.10 94.107,83.82 v1(96.139,81.788) ; v1(104.267,83.058) 113.665,83.058 v2(115.824,80.899) 122.428,74.295 RJoa3.2 RJoa1.2 RJoa2.1
P1: J5.1 P2.1 | length 3.3
  Bottom Layer w1: P2.1@106.94,51.943 J5.1
P2: J5.2 P2.2 | length 3.3
  Bottom Layer w1: P2.2 J5.2@110.099,54.62
P3: J5.3 P2.3 | length 3.3
  Bottom Layer w1: P2.3@106.94,57.023 J5.3
P4: J5.4 P2.4 | length 3.3
  Bottom Layer w1: P2.4 J5.4@110.099,59.7
P5: J5.5 P2.5 | length 3.3
  Bottom Layer w1: P2.5@106.94,62.103 J5.5
P6: J5.6 P2.6 | length 3.3
  Bottom Layer w1: P2.6 J5.6@110.099,64.78
P7: J5.7 P2.7 | length 3.3
  Bottom Layer w1: P2.7@106.94,67.183 J5.7
P8: J5.8 P2.8 | length 3.3
  Bottom Layer w1: P2.8 J5.8@110.099,69.86
P9: J5.9 P2.9 | length 3.3
  Bottom Layer w1: P2.9@106.94,72.263 J5.9
P10: J5.10 P2.10 | length 3.3
  Bottom Layer w1: P2.10 J5.10@110.099,74.94
P11: P2.11
P13: J4.1 P1.1 | length 3.3
  Bottom Layer w1: J4.1 P1.1@91.684,79.883
P14: J4.2 P1.2 | length 3.3
  Bottom Layer w1: J4.2@88.529,77.48 P1.2
P15: J4.3 P1.3 | length 3.3
  Bottom Layer w1: J4.3 P1.3@91.684,74.803
P16: J4.4 P1.4 | length 3.3
  Bottom Layer w1: J4.4@88.529,72.4 P1.4
P17: J4.5 P1.5 | length 3.3
  Bottom Layer w1: J4.5 P1.5@91.684,69.723
P18: J4.6 P1.6 | length 3.3
  Bottom Layer w1: J4.6@88.529,67.32 P1.6
P19: J4.7 P1.7 | length 3.3
  Bottom Layer w1: J4.7 P1.7@91.684,64.643
P20: J4.8 P1.8 | length 3.3
  Bottom Layer w1: J4.8@88.529,62.24 P1.8
P21: J4.9 P1.9 | length 3.3
  Bottom Layer w1: J4.9 P1.9@91.684,59.563
R: J2.2 U2.2 | length 26.9
  Top Layer w1: v1(93.218,126.746) 93.348,126.616 97.173,126.616 97.684,127.127 103.251,127.127 105.156,125.222 v1(106.299,125.222)
  Bottom Layer w1: J2.2 86.36,122.047 91.059,126.746 v1(93.218,126.746) ; U2.2 106.299,123.19 v1(106.299,125.222)
RAW: P1.12
RBUF: RR.1 U2.3 | length 20.5
  Bottom Layer w1: RR.1@87.884,128.27 92.329,128.27 94.377,130.318 97.901,130.318 103.632,124.587 U2.3
V_SYNC: J2.5 RVSync.1 | length 42.4
  Top Layer w1: v1(88.138,113.411) 88.218,113.491 110.443,113.491 v1(110.49,113.538)
  Bottom Layer w1: J2.5 85.598,113.411 v1(88.138,113.411) ; v1(110.49,113.538) 112.776,115.824 RVSync.1
VGA_1: D1.1 RR.2 VGA1.1 | length 9.9
  Bottom Layer w1: RR.2@87.884,138.43 92.202,138.43 95.623,141.851 VGA1.1@95.623,142.621
VGA_2: D2.1 RG.2 VGA1.2 | length 8.4
  Bottom Layer w1: RG.2 97.913,138.43 ; VGA1.2@97.913,142.621 97.913,138.43 ; D2.1 99.701,138.43 97.913,138.43
VGA_3: D3.1 RB.2 VGA1.3 | length 10.5
  Bottom Layer w1: VGA1.3@100.203,142.621 100.203,141.605 103.124,138.684 RB.2 108.452,138.684 D3.1
VGA_13: RHSync.2 VGA1.13 | length 27.8
  Bottom Layer w1: RHSync.2@84.582,138.684 84.582,139.954 83.439,141.097 83.439,148.336 84.199,149.096 98.808,149.096 VGA1.13@100.203,147.701
VGA_14: RVSync.2 VGA1.14 | length 17.3
  Bottom Layer w1: VGA1.14@102.493,147.701 102.493,148.213 103.376,149.096 106.555,149.096 107.95,147.701 107.95,144.272 111.887,140.335 RVSync.2@111.887,138.938
VINF: RDInf1.2 RDInf2.2 U1.4 U1.8 | length 31.9
  Top Layer w1: RDInf1.2 89.281,100.584 v1(93.091,96.774)
  Bottom Layer w1: RDInf1.2 RDInf2.2 84.582,90.043 U1.8 ; v1(93.091,96.774) U1.4
VSUP: RDSup1.2 RDSup2.2 U1.7 U1.11 | length 26.4
  Bottom Layer w1: U1.11 93.853,88.392 92.075,88.392 89.027,91.44 U1.7 89.027,98.425 90.932,100.33 RDSup2.2 RDSup1.2
pads on no net: Switch.2 Switch.4 VGA1.0 VGA1.9 VGA1.11 VGA1.12 VGA1.15 VGA1.16

## Keep-outs
Keep-Out Layer:
  the board outline again, w0.3

## Silkscreen, mask and mechanical layers (free items; w line width, h text height)
Top Overlay:
  text "CompL" at 76.073,81.915 h1.52
  text "CompR" at 114.808,77.851 h1.52
  text "gnd" at 137.541,76.962 h1.52
  text "vcc" at 137.668,74.295 h1.52
  text "JLY" at 55.753,68.453 h1.52
  text "JRY" at 141.478,67.31 h1.52
  text "JLX" at 55.753,62.357 h1.52
  text "JRX" at 141.351,61.849 h1.52

## Text inside footprints (layer, text, board x,y; h text height)
BZ1: Top Overlay "+" at 144.94,103.704 h1 r90